# EAGLE board OSH_PARK_V01 (EAGLE 7.2.0)
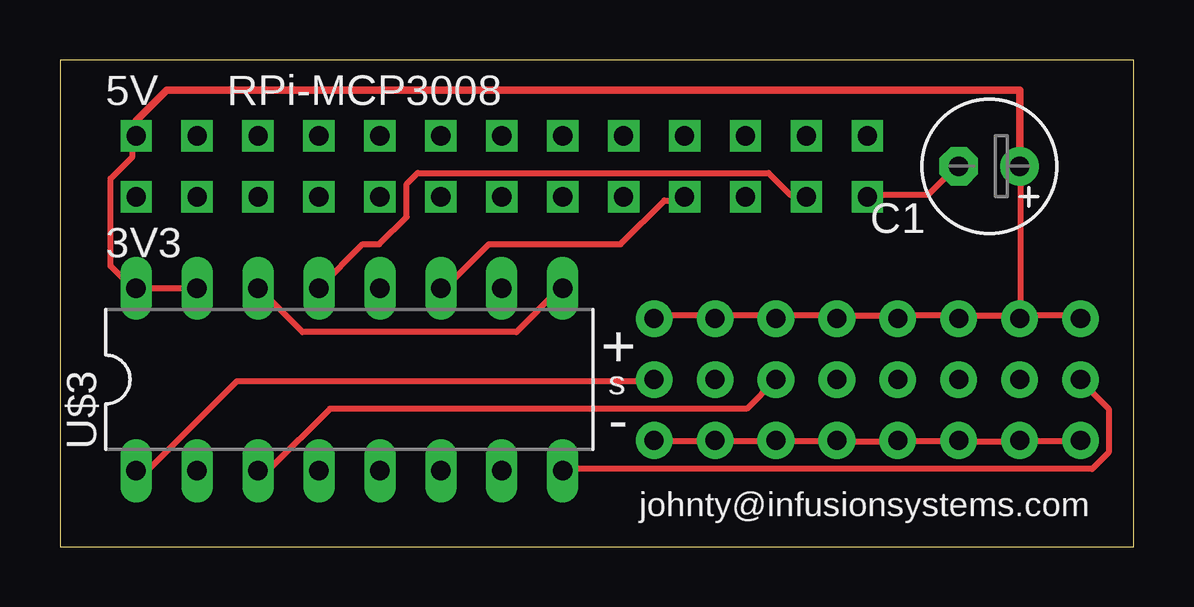
[diagram p0: board, top side]
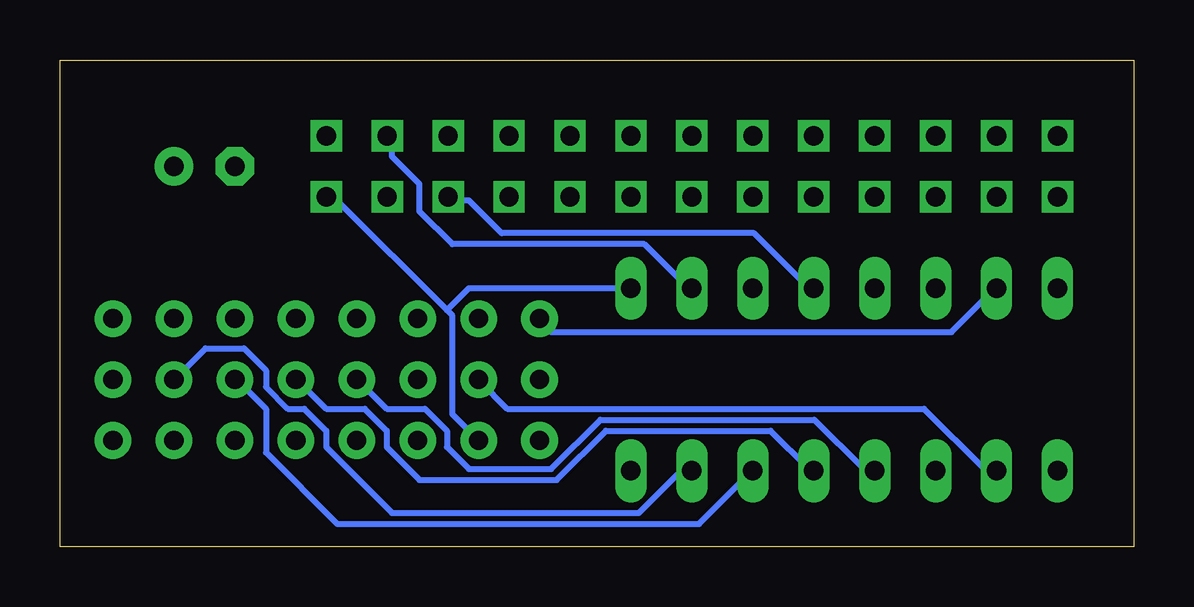
[diagram p1: board, bottom side, seen from below]

Size 44.76 x 20.31 mm. Coordinates in mm from the lower left corner, seen from the top.
Outline: 0,0 44.76,0 44.76,20.31 0,20.31 0,0
Copper layers (1*16): Top 0.035mm / dielectric 1.5mm / Bottom 0.035mm
Design rules "default": minimum track width 10mil, minimum drill 24mil, track to track 8mil, track to pad 8mil, pad to pad 8mil, via to via 8mil, smd to smd 8mil, copper to edge 40mil, drill to drill 8mil, minimum pad ring 10mil, minimum via ring 8mil, stop-mask expansion 4mil, vias tented up to drill 0mil, thermal gap 10mil
Net classes: 0 default: width 0.254 mm

## Footprints (pad centres in the part's own frame; a part is rotated, then mirrored left to right if it is on the bottom)
E2,5-6 = drill 0.813 pad 1.6: + -1.27,0 | drill 0.813 pad 1.6 octagon: - 1.27,0
3X8_PKG = drill 0.8 pad 1.524: GND0 -5.08,-3.81; GND1 -2.54,-3.81; GND2 0,-3.81; GND3 2.54,-3.81; GND4 5.08,-3.81; GND5 7.62,-3.81; GND6 10.16,-3.81; GND7 12.7,-3.81; S0 -5.08,-1.27; S1 -2.54,-1.27; S2 0,-1.27; S3 2.54,-1.27; S4 5.08,-1.27; S5 7.62,-1.27; S6 10.16,-1.27; S7 12.7,-1.27; VCC0 -5.08,1.27; VCC1 -2.54,1.27; VCC2 0,1.27; VCC3 2.54,1.27; VCC4 5.08,1.27; VCC5 7.62,1.27; VCC6 10.16,1.27; VCC7 12.7,1.27
RPI26 = drill 0.8 square: 3V3_0 -13.97,-1.27; 3V3_1 6.35,-1.27; 5V0 -13.97,1.27; 5V1 -11.43,1.27; GND0 -8.89,1.27; GND1 1.27,1.27; GND2 8.89,1.27; GND3 -3.81,-1.27; GND4 16.51,-1.27; GPIO0 -11.43,-1.27; GPIO01 -8.89,-1.27; GPIO04 -6.35,-1.27; GPIO07 16.51,1.27; GPIO08 13.97,1.27; GPIO09 11.43,-1.27; GPIO10 8.89,-1.27; GPIO11 13.97,-1.27; GPIO14 -6.35,1.27; GPIO15 -3.81,1.27; GPIO17 -1.27,-1.27; GPIO18 -1.27,1.27; GPIO21 1.27,-1.27; GPIO22 3.81,-1.27; GPIO23 3.81,1.27; GPIO24 6.35,1.27; GPIO25 11.43,1.27
DIL16 = drill 0.813 long: 1 -8.89,-3.81; 2 -6.35,-3.81; 3 -3.81,-3.81; 4 -1.27,-3.81; 5 1.27,-3.81; 6 3.81,-3.81; 7 6.35,-3.81; 8 8.89,-3.81; 9 8.89,3.81; 10 6.35,3.81; 11 3.81,3.81; 12 1.27,3.81; 13 -1.27,3.81; 14 -3.81,3.81; 15 -6.35,3.81; 16 -8.89,3.81

## Placement (x,y rotation side)
C1  [E2,5-6]  38.73,15.88 180 top
U$1  3BY8  [3X8_PKG]  29.84,8.26 0 top
U$2  RPI_26  [RPI26]  17.14,15.88 0 top
U$3  MCP3008P  [DIL16]  12.06,6.99 0 top

## Library data of the parts
C1 = rcl
U$1 U$2 = jt_lib
U$3 = MCP3008

## Nets
GND: C1.- U$1.GND0 U$1.GND1 U$1.GND2 U$1.GND3 U$1.GND4 U$1.GND5 U$1.GND6 U$1.GND7 U$2.GND4 U$3.9 U$3.14
N$1: U$1.S0 U$3.1
N$2: U$1.S1 U$3.2
N$3: U$1.S2 U$3.3
N$4: U$1.S3 U$3.4
N$5: U$1.S4 U$3.5
N$6: U$1.S5 U$3.6
N$7: U$1.S6 U$3.7
N$8: U$1.S7 U$3.8
N$9: U$2.GPIO09 U$3.12
N$10: U$2.GPIO11 U$3.13
N$11: U$2.GPIO10 U$3.11
N$12: U$2.GPIO08 U$3.10
VCC: C1.+ U$1.VCC0 U$1.VCC1 U$1.VCC2 U$1.VCC3 U$1.VCC4 U$1.VCC5 U$1.VCC6 U$1.VCC7 U$2.5V0 U$3.15 U$3.16

## Tracks (layer width: path | path; a pad name or v marks a point on that pad's centre or on a via)
GND
  Top 0.254: U$3.14 8.28,10.79 10.11,8.97 19.02,8.97 20.85,10.79 U$3.9 | U$2.GND4 33.66,14.68 36.17,14.68 37.31,15.82 C1.- | U$1.GND7 42.34,4.39 40.06,4.39 U$1.GND6 39.83,4.39 37.54,4.39 U$1.GND5 37.31,4.39 35.03,4.39 U$1.GND4 34.8,4.39 32.51,4.39 U$1.GND3 32.28,4.39 30,4.39 U$1.GND2 29.77,4.39 27.48,4.39 U$1.GND1 27.25,4.39 24.97,4.39 U$1.GND0
  Bottom 0.254: 28.63,9.88 28.4,9.65 28.4,5.54 U$1.GND1 | 28.63,9.88 33.2,14.45 33.66,14.45 U$2.GND4 | U$3.9 27.71,10.79 28.63,9.88
N$1
  Top 0.254: U$3.1 3.25,3.25 3.71,3.25 7.37,6.91 24.74,6.91 U$1.S0
N$2
  Bottom 0.254: U$3.2 5.77,3.25 6.22,3.25 8.74,5.77 26.11,5.77 27.25,6.91 U$1.S1
N$3
  Top 0.254: U$1.S2 28.63,5.77 11.25,5.77 8.74,3.25 8.28,3.25 U$3.3
N$4
  Bottom 0.254: U$3.4 10.79,3.25 11.25,3.25 13.31,5.31 22.23,5.31 24.28,3.25 27.71,3.25 28.63,4.17 28.63,4.85 29.54,5.77 31.14,5.77 32.28,6.91 U$1.S3
N$5
  Bottom 0.254: U$3.5 13.54,3.25 15.14,4.85 22,4.85 24.05,2.79 29.77,2.79 31.14,4.17 31.14,4.85 32.05,5.77 33.66,5.77 34.8,6.91 U$1.S4
N$6
  Bottom 0.254: U$3.6 16.05,3.02 18.11,0.96 33.2,0.96 36.17,3.94 36.17,5.77 37.31,6.91 U$1.S5
N$7
  Bottom 0.254: U$3.7 18.57,3.02 19.02,3.02 20.62,1.42 30.91,1.42 33.66,4.17 33.66,4.85 34.57,5.77 35.26,5.77 36.17,6.68 36.17,7.37 37.08,8.28 38.68,8.28 39.83,7.14 U$1.S6
N$8
  Top 0.254: U$3.8 21.08,3.25 43.03,3.25 43.71,3.94 43.71,5.77 42.57,6.91 U$1.S7
N$9
  Bottom 0.254: U$2.GPIO09 28.4,14.45 27.71,14.45 26.34,13.08 15.82,13.08 13.54,10.79 U$3.12
N$10
  Top 0.254: U$3.13 12.62,12.62 13.31,12.62 14.45,13.77 14.45,15.14 14.91,15.6 29.54,15.6 30.45,14.68 30.91,14.68 U$2.GPIO11
N$11
  Top 0.254: U$2.GPIO10 25.88,14.45 25.2,14.45 23.37,12.62 17.88,12.62 16.05,10.79 U$3.11
N$12
  Bottom 0.254: U$2.GPIO08 30.91,16.97 30.91,16.28 29.77,15.14 29.77,13.99 28.4,12.62 20.4,12.62 18.57,10.79 U$3.10
VCC
  Top 0.254: 40.06,9.65 42.34,9.65 U$1.VCC7 | 40.06,9.65 40.06,15.82 C1.+ | 40.06,9.65 U$1.VCC6 39.83,9.65 37.54,9.65 U$1.VCC5 37.31,9.65 35.03,9.65 U$1.VCC4 34.8,9.65 32.51,9.65 U$1.VCC3 32.28,9.65 30,9.65 U$1.VCC2 29.77,9.65 27.48,9.65 U$1.VCC1 27.25,9.65 24.97,9.65 U$1.VCC0 | U$2.5V0 3.02,16.97 3.02,16.28 2.11,15.37 2.11,11.71 3.02,10.79 U$3.16 U$3.15
  Top 0.305: U$2.5V0 3.17,17.78 4.45,19.05 40.01,19.05 C1.+
  Bottom 0.254: U$3.15 5.77,10.79 7.59,8.97 24.28,8.97 24.74,9.42 U$1.VCC0

## Text on the board
tNames: RPi-MCP3008 | + | s | - | johnty@infusionsystems.com